# Allegro board PULSE_MODULATION.brd
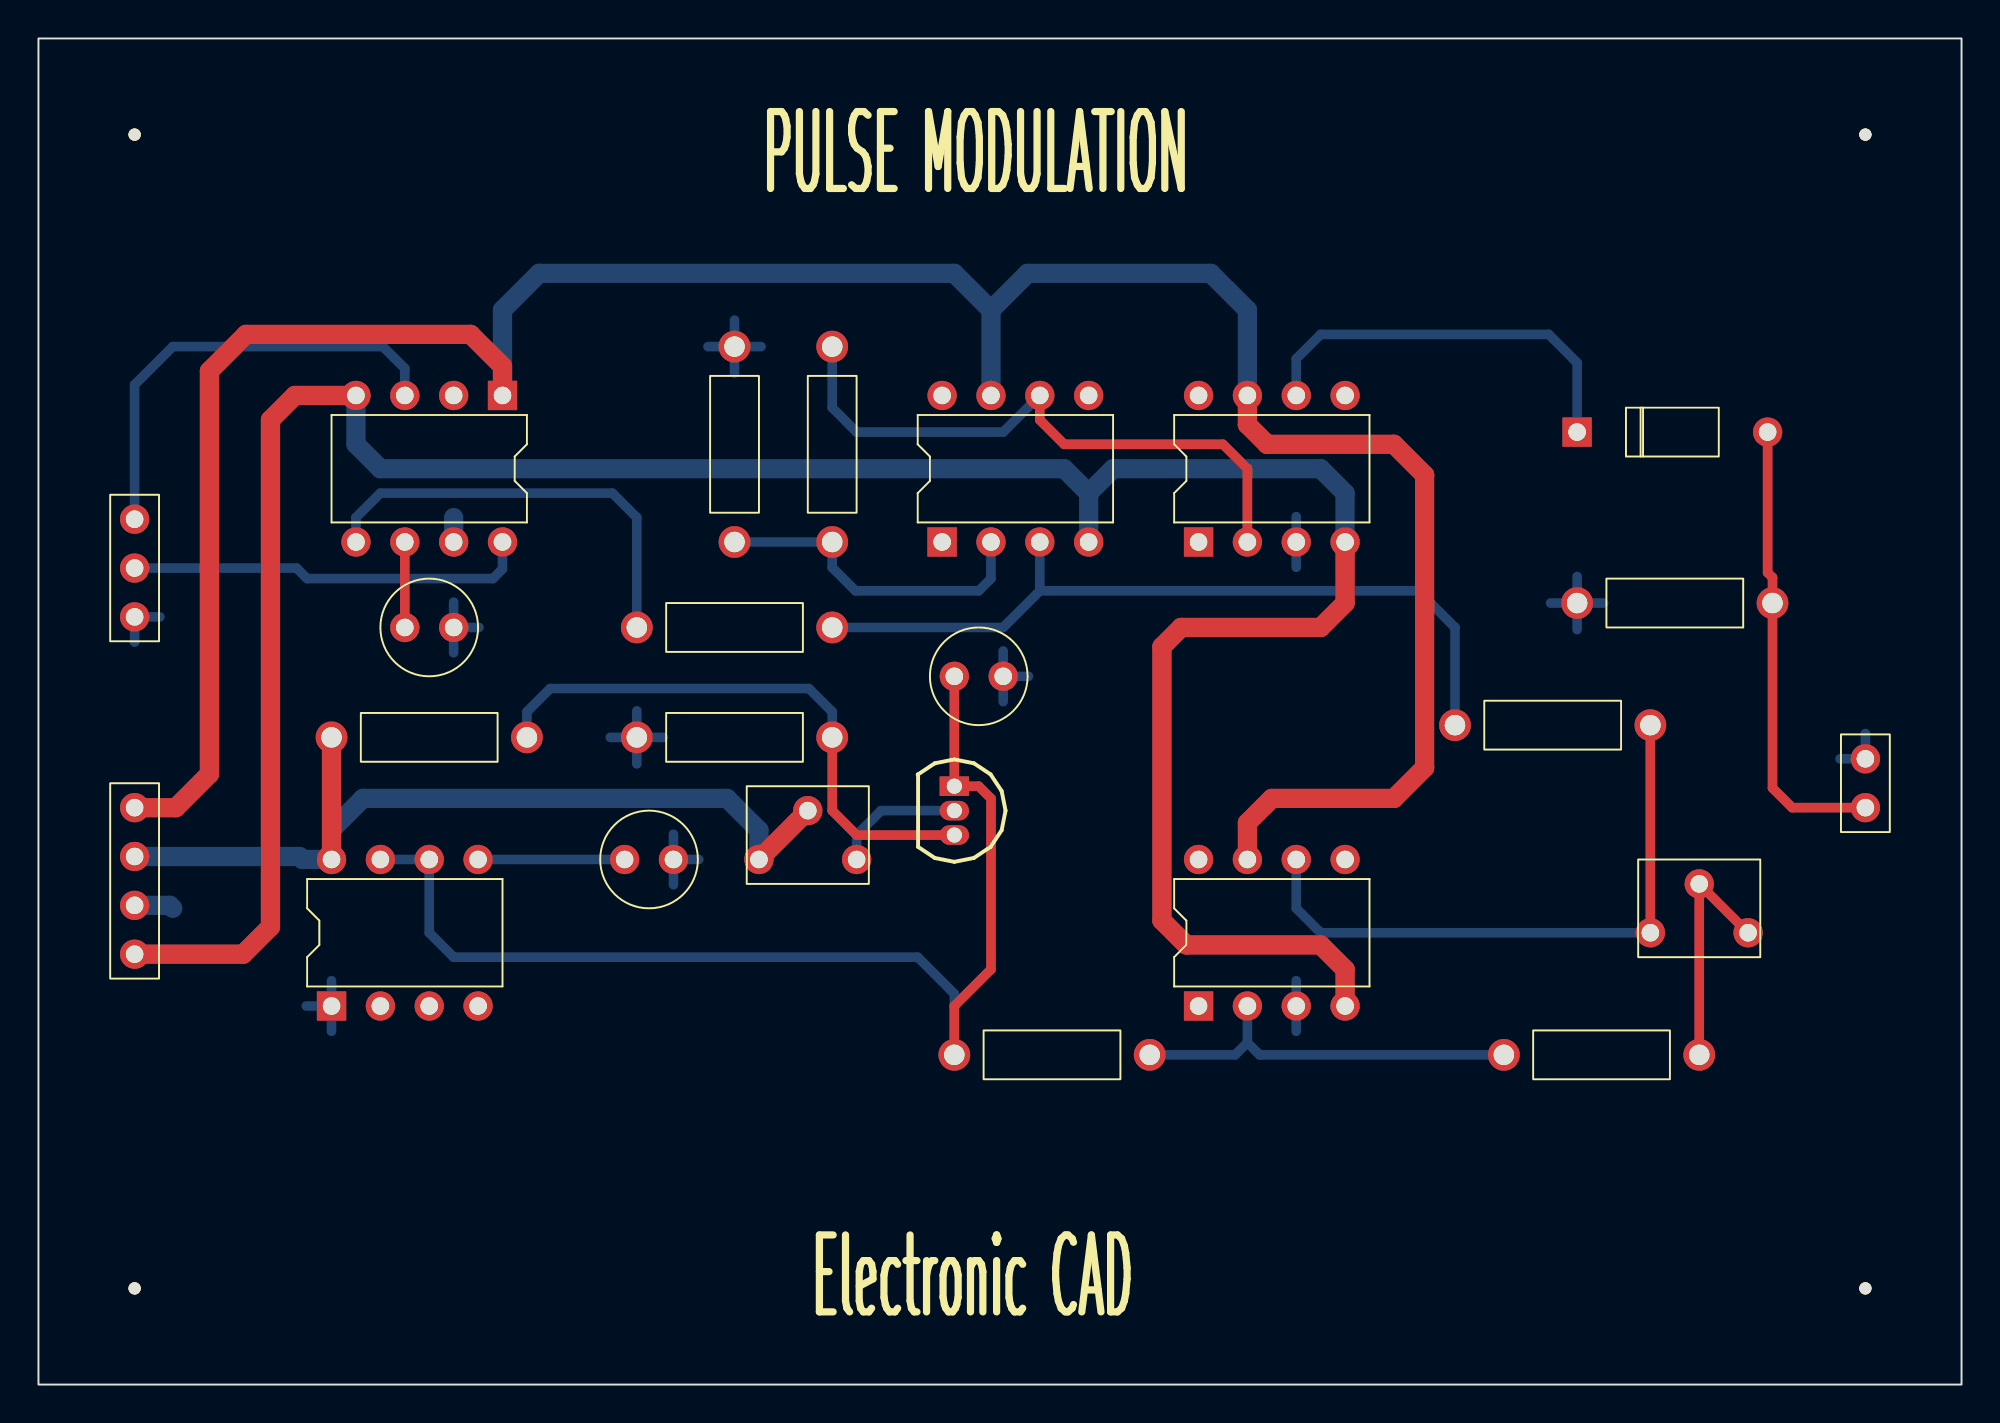
[diagram p0: board, top side]
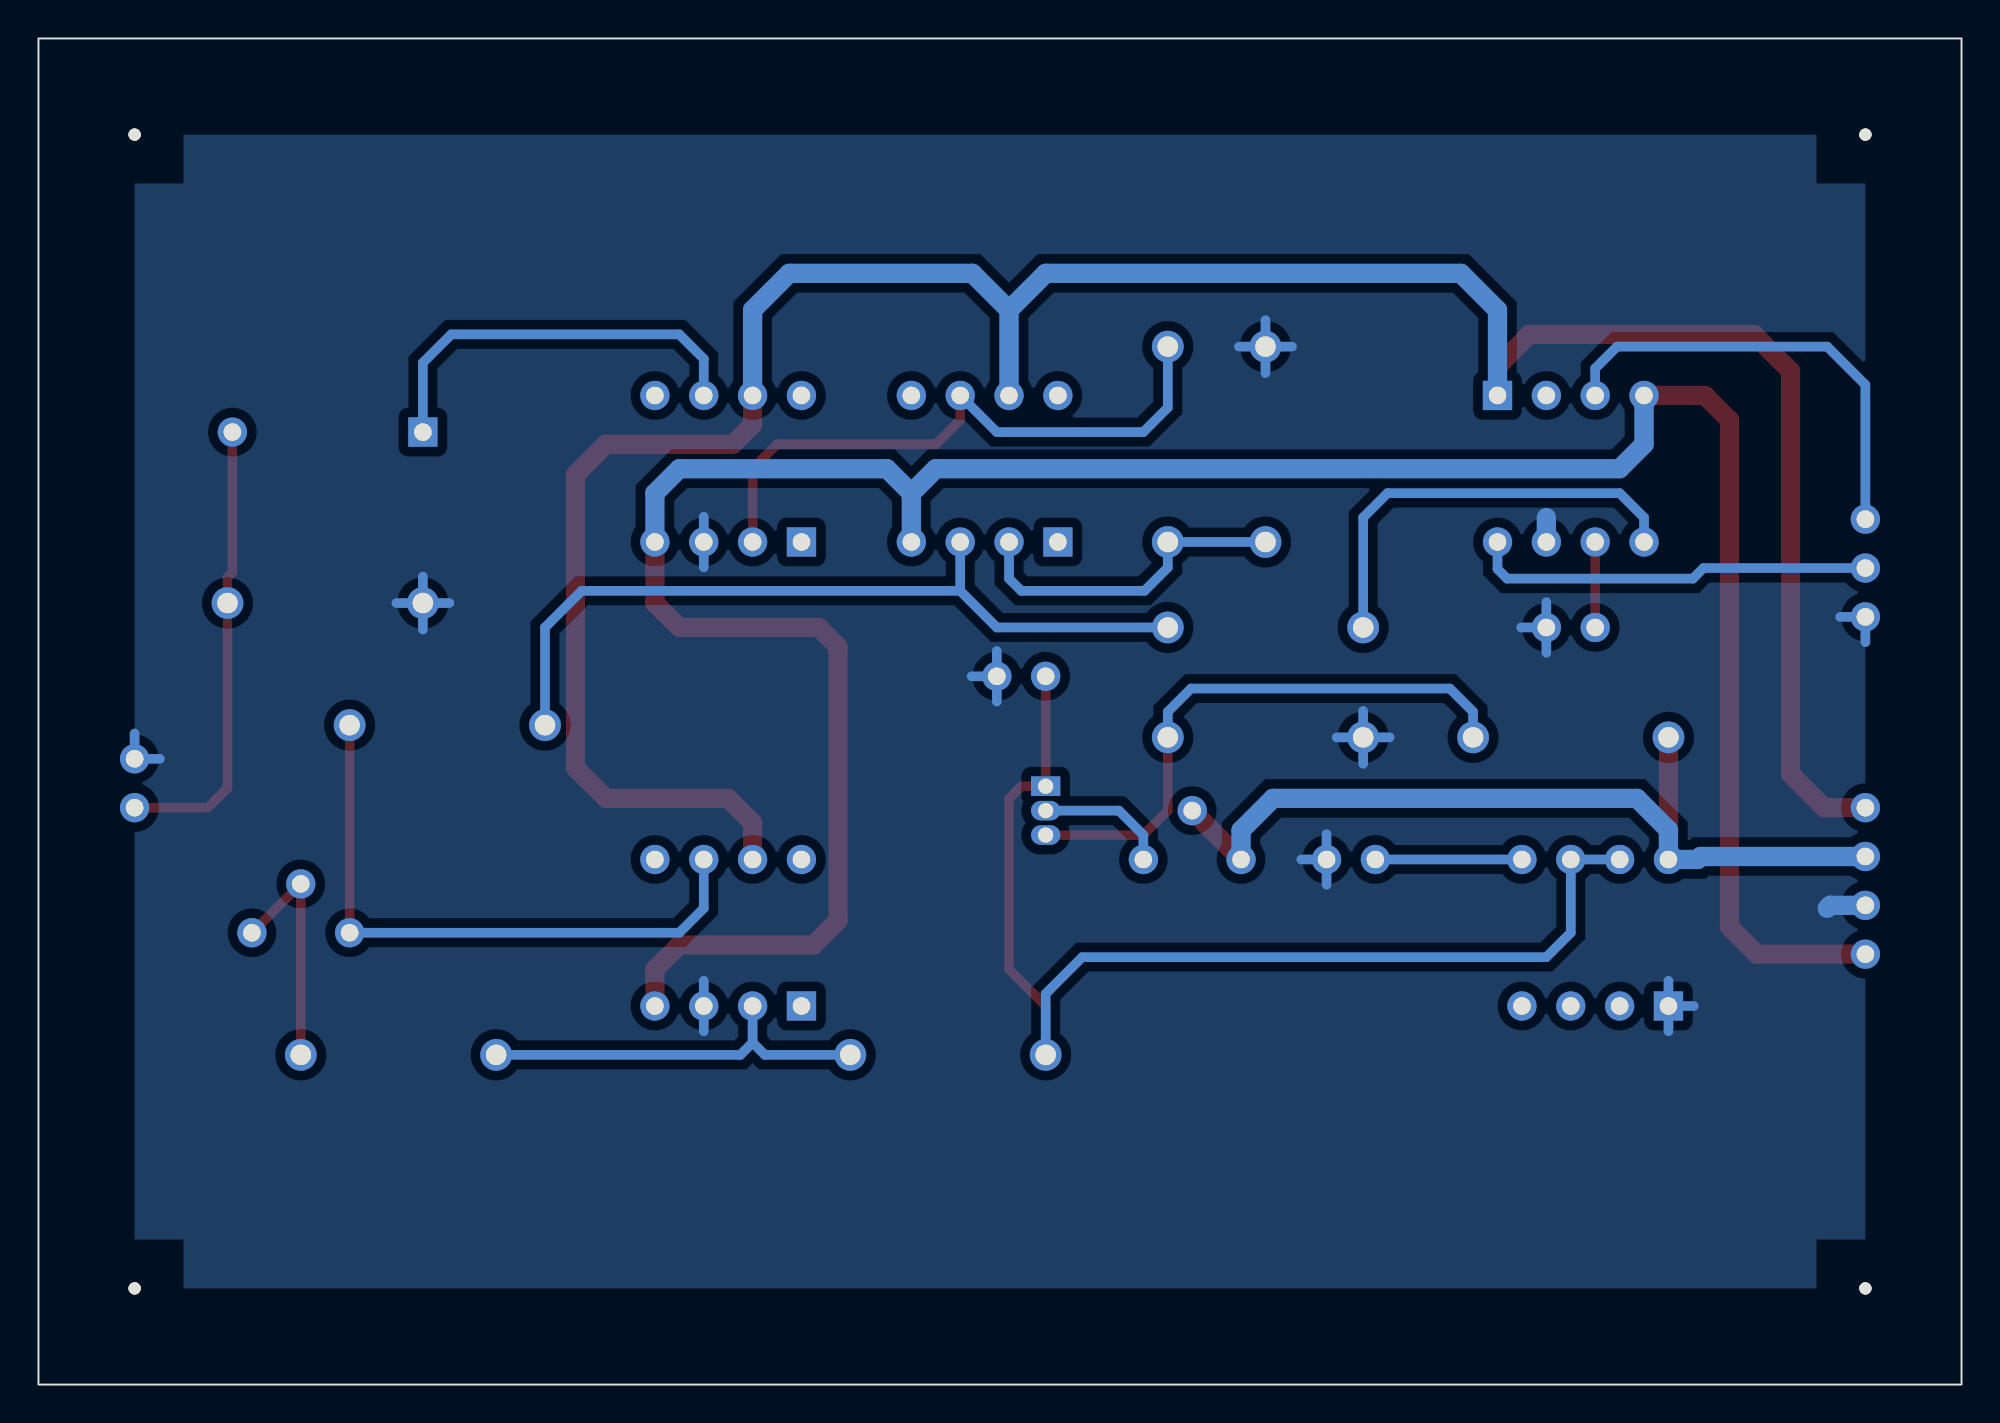
[diagram p1: board, bottom side, seen from below]

Outline 100 x 70 mm; copper layers: TOP, BOTTOM. Coordinates in mm from the lower left corner of the outline.
Outline path: rectangle 0,0 100,70

## Design rules (mm)
constraint set DEFAULT: min track width 0.5
nets with their own width: min track width 1; nets +5V +15V -15V GND

## Placement (name value [footprint] x y rotation side)
C1  0.01uF  [CAP196]  47.62 36.83 270 top
C2  0.01uF  [CAP196]  30.48 27.3 270 top
C3  0.01uF  [CAP196]  21.59 39.37 90 top
D1  1S1588  [DO41]  80.01 49.53 270 top
J1  CON4  [JUMPER4]  5 30 270 top
J2  CON3  [JUMPER3]  5 45 270 top
J3  CON2  [JUMPER2]  95 30 90 top
NOREF  -  [unnamed]  5 65 0 top
NOREF#2  -  [unnamed]  95 65 0 top
NOREF#3  -  [#2]  0 70 0 top
NOREF#4  -  [unnamed]  95 5 0 top
NOREF#5  -  [unnamed]  5 5 0 top
NOREF#6  -  [#2]  100 0 90 top
Q1  2SA1015  [TO92]  47.62 31.11 270 top
R1  560  [RES400]  76.2 17.14 270 top
R2  39K  [RES400]  15.24 33.66 270 top
R3  6.2K  [RES400]  47.62 17.14 270 top
R4  100K  [RES400]  41.27 33.66 90 top
R5  10K  [RES400]  83.82 34.29 90 top
R6  10K  [RES400]  41.27 43.81 0 top
R7  10K  [RES400]  31.11 39.37 270 top
R8  10K  [RES400]  36.2 43.81 0 top
R9  10K  [RES400]  90.17 40.64 90 top
U1  NE555  [DIP8_3]  15.24 19.68 90 top
U2  LF356  [DIP8_3]  60.33 19.68 90 top
U3  LF398  [DIP8_3]  24.13 51.44 270 top
U4  LF356  [DIP8_3]  46.99 43.81 90 top
U5  LF356  [DIP8_3]  60.33 43.81 90 top
VR1  5K  [RESADJ]  42.55 27.3 270 top
VR2  20K  [RESADJ]  88.9 23.5 270 top

## Library data of the parts
C1-C3 = CAP NP: Tolerance: ***; User Part Number: ***
D1 = D1S1588
J1 = CON4: User Part Number: ***
J2 = CON3: User Part Number: ***
J3 = CON2: User Part Number: ***
Q1 = Q2SA1015
R1-R9 = R: Tolerance: ***; User Part Number: ***
U1 = NE555_0: Tolerance: ***; User Part Number: ***
U2 U4 U5 = LF356_1: Tolerance: ***; User Part Number: ***
U3 = LF398_0: Tolerance: ***; User Part Number: ***
VR1 VR2 = POT: Tolerance: ***; User Part Number: ***

## Footprints (pads in the part's own frame, mm; a bottom-side part is the same pattern mirrored in y, then rotated)
CAP196
  round 1.524 hole 0.914: 1(0,0) 2(0,2.54)
DIP8_3
  rect 1.524x1.524 hole 0.914: 1(0,0)
  round 1.524 hole 0.914: 2(0,-2.54) 3(0,-5.08) 4(0,-7.62) 5(7.62,-7.62) 6(7.62,-5.08) 7(7.62,-2.54) 8(7.62,0)
DO41
  rect 1.524x1.524 hole 0.914: 1(0,0)
  round 1.524 hole 0.914: 2(0,9.906)
JUMPER2
  round 1.524 hole 0.914: 1(0,0) 2(2.54,0)
JUMPER3
  round 1.524 hole 0.914: 1(0,0) 2(2.54,0) 3(5.08,0)
JUMPER4
  round 1.524 hole 0.914: 1(0,0) 2(2.54,0) 3(5.08,0) 4(7.62,0)
RES400
  round 1.651 hole 1.067: 1(0,0) 2(0,10.16)
RESADJ
  round 1.524 hole 0.914: 1(0,0) 2(-2.54,-2.54) 3(0,-5.08)
TO92
  rect 1.016x1.524 hole 0.787: 1(0,0)
  oval 1.016x1.524 hole 0.787: 2(1.27,0) 3(2.54,0)
unnamed
  round 0.635 hole 3.175 unplated: (0,0)

## Nets
+5V: J1.2 R2.1 U1.8(VCC) VR1.2(WIPER) VR1.3
+15V: J1.1 U2.7 U3.1 U4.7 U5.7
-15V: J1.4 U2.4(V-) U3.4(V-) U4.4(V-) U5.4(V-)
GND: C1.2 C2.2 C3.1 J1.3 J2.3 J3.2 R4.2 R8.2 R9.2 U1.1 U2.3 U3.7 U5.3
CLOCK: U1.2
SIG_1: R5.1 U2.6 VR2.3
N00737: C1.1 Q1.1(E) R3.1 U1.6 U1.7
N00763: Q1.3 R2.2 R4.1
N00785: C2.1 U1.5
N00934: Q1.2 VR1.1
N01264: R1.1 R3.2 U2.2
N01326: R1.2 VR2.1 VR2.2(WIPER)
N01492: D1.2 J3.1 R9.1
N01541: D1.1 U5.6
N01674: R6.2 U4.6 U5.2
N01804: R6.1 R8.1 U4.2
N02138: R5.2 R7.2 U4.3
N02207: R7.1 U3.5
N02227: J2.1 U3.3
N02239: J2.2 U3.8
N02465: C3.2 U3.6

Pads without a net: U1 3 4; U2 1 5 8; U3 2; U4 1 5 8; U5 1 5 8

## Routing (per net, layer and track width the routed paths; a pad name or vN(x,y) marks a point on that pad's centre or on a via; arc(x,y) is an arc through that point)
+5V: length 46.9
  TOP w1: VR1.3 VR1.2 ; R2.1 U1.8
  BOTTOM w1: J1.2 13.57,27.46 13.72,27.3 U1.8 15.24,28.84 16.88,30.48 35.81,30.48 37.47,28.82 VR1.3
+15V: length 138.4
  TOP w1: J1.1 7.14,30 8.89,31.75 8.89,52.7 10.79,54.61 22.47,54.61 24.13,52.95 U3.1 ; 62.87,51.44 62.87,49.92 63.89,48.9 70.48,48.9 72.08,47.3 72.08,32.08 70.48,30.48 64.14,30.48 62.87,29.21 U2.7
  BOTTOM w1: 62.87,51.44 62.87,55.88 60.96,57.78 51.44,57.78 49.53,55.88 ; 49.53,55.88 49.53,51.44 ; 49.53,55.88 47.62,57.78 26.04,57.78 24.13,55.88 U3.1
-15V: length 140.5
  TOP w1: U3.4 13.34,51.44 12.06,50.16 12.06,23.8 10.64,22.38 J1.4 ; 67.94,43.81 67.94,40.64 66.67,39.37 59.42,39.37 58.42,38.37 58.42,24.13 59.69,22.86 66.67,22.86 67.94,21.59 67.94,19.68
  BOTTOM w1: U4.4 54.61,46.35 ; 54.61,46.35 53.34,47.62 17.78,47.62 16.51,48.9 U3.4 ; 54.61,46.35 55.88,47.62 66.67,47.62 67.94,46.35 67.94,43.81
GND: length 46.2
  BOTTOM w0.5: 65.41,45.13 U5.3 65.41,42.5 ; 33.02,25.99 C2.2 ; C2.2 33.02,28.62 ; C2.2 34.34,27.3 ; 34.82,53.98 36.2,53.98 ; 36.2,53.98 37.57,53.98 ; 36.2,53.98 36.2,55.35 ; 36.2,53.98 36.2,52.6 ; C3.1 22.91,39.37 ; C3.1 21.59,40.69 ; C3.1 21.59,38.05 ; R4.2 31.11,35.03 ; R4.2 31.11,32.28 ; R4.2 32.49,33.66 ; R4.2 29.74,33.66 ; 65.41,18.37 U2.3 65.41,21 ; 93.69,32.54 J3.2 95,33.85 ; C1.2 51.48,36.83 ; C1.2 50.16,35.52 ; C1.2 50.16,38.15 ; 80.01,39.26 R9.2 ; R9.2 81.39,40.64 ; R9.2 80.01,42.02 ; R9.2 78.63,40.64 ; U1.1 15.24,21 ; U1.1 15.24,18.37 ; U1.1 13.93,19.68 ; 6.32,39.92 J2.3 5,38.6
  BOTTOM w1: J1.3 6.83,24.92 6.99,24.77 ; U3.7 21.59,45.09
SIG_1: length 32.3
  TOP w0.5: VR2.3 R5.1
  BOTTOM w0.5: U2.6 65.41,24.77 66.67,23.5 VR2.3
N00737: length 60.1
  TOP w0.5: R3.1 47.62,19.68 49.53,21.59 49.53,30.48 48.89,31.11 Q1.1 C1.1
  BOTTOM w0.5: R3.1 47.62,20.32 45.72,22.23 21.59,22.23 20.32,23.5 U1.6 U1.7
N00763: length 30.2
  TOP w0.5: R4.1 41.27,29.84 42.55,28.57 Q1.3
  BOTTOM w0.5: R4.1 41.27,34.98 40.06,36.2 26.61,36.2 25.4,34.98 R2.2
N00785: length 7.6
  BOTTOM w0.5: U1.5 C2.1
N00934: length 6.9
  BOTTOM w0.5: VR1.1 42.55,28.57 43.81,29.84 Q1.2
N01264: length 20.8
  BOTTOM w0.5: 62.87,17.78 62.23,17.14 R3.2 ; 62.87,17.78 63.5,17.14 R1.1 ; 62.87,17.78 U2.2
N01326: length 12.5
  TOP w0.5: VR2.1 VR2.2 R1.2
N01492: length 23.9
  TOP w0.5: D1.2 89.92,42.22 90.17,41.97 R9.1 90.17,31.02 91.19,30 J3.1
N01541: length 21.3
  BOTTOM w0.5: D1.1 80.01,53.14 78.54,54.61 66.67,54.61 65.41,53.34 65.41,51.44
N01674: length 32.2
  TOP w0.5: U5.2 62.87,47.62 61.59,48.9 53.34,48.9 52.07,50.16 52.07,51.44
  BOTTOM w0.5: 52.07,51.44 50.16,49.53 42.55,49.53 41.27,50.8 41.27,53.98
N01804: length 17.3
  BOTTOM w0.5: R8.1 R6.1 41.27,42.48 42.48,41.27 48.89,41.27 49.53,41.91 U4.2
N02138: length 41.6
  BOTTOM w0.5: U4.3 52.07,41.27 ; 52.07,41.27 50.16,39.37 R7.2 ; 52.07,41.27 71.75,41.27 73.66,39.37 R5.2
N02207: length 22.6
  BOTTOM w0.5: R7.1 31.11,45.09 29.84,46.35 17.78,46.35 16.51,45.09 U3.5
N02227: length 23.7
  BOTTOM w0.5: U3.3 19.05,52.84 17.91,53.98 6.98,53.98 5,51.99 J2.1
N02239: length 21
  BOTTOM w0.5: J2.2 13.42,42.46 13.97,41.91 23.63,41.91 24.13,42.41 U3.8
N02465: length 4.4
  TOP w0.5: U3.6 C3.2

## Copper pours and planes (outline as drawn; the poured copper is in the pictures)
GND on BOTTOM: 95,5 95,65 5,65 5,5 ; 5 cut-outs

## Text on the board
Ref Des/Silkscreen Top: PULSE MODULATION | Electronic CAD
DIMENSION: FIGURE | FINISHED_SIZE | 0.787 | 0.914 | 1.067 | 3.175 | DRILL CHART: TOP to BOTTOM | ALL UNITS ARE IN MILLIMETERS | PLATED | NON-PLATED | QTY | 3 | 63 | 18 | 4
